# EAGLE board power (EAGLE 5.11)
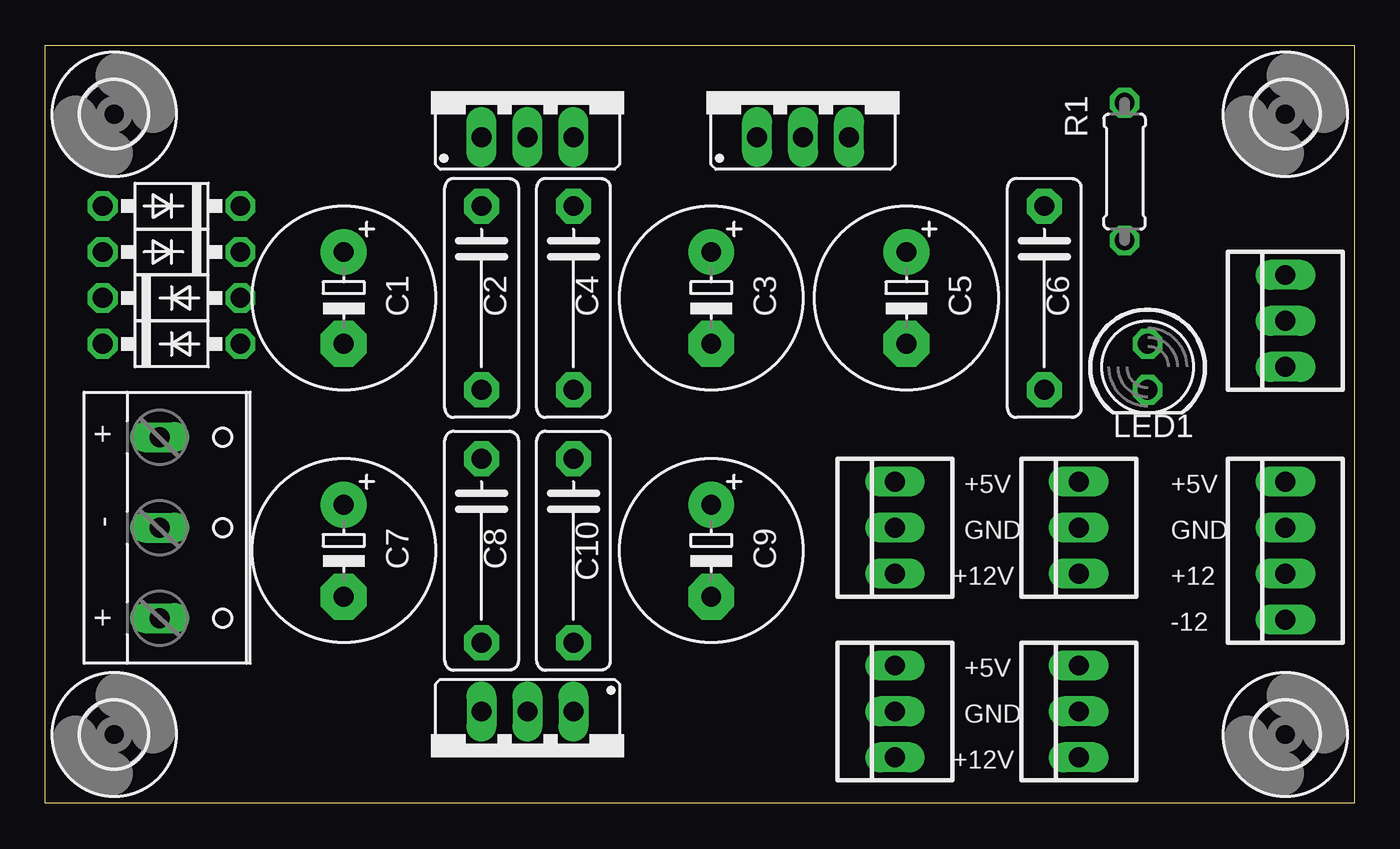
[diagram p0: board, top side]
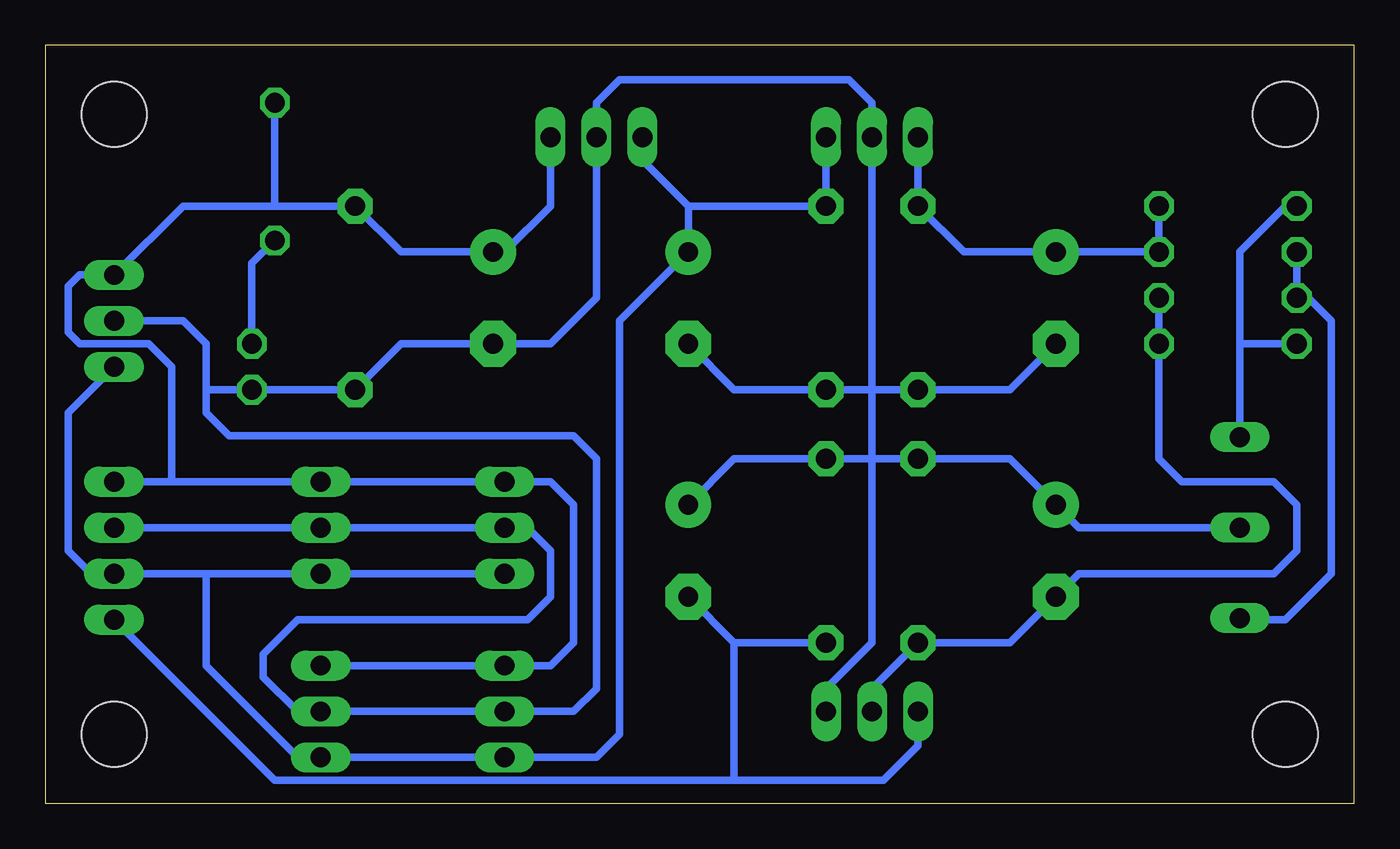
[diagram p1: board, bottom side, seen from below]

Size 72.39 x 41.91 mm. Coordinates in mm from the lower left corner, seen from the top.
Outline: 0,0 0,41.91 72.39,41.91 72.39,0 0,0
Copper layers (1*16): Top 0.035mm / dielectric 1.5mm / Bottom 0.035mm
Design rules "default": minimum track width 10mil, minimum drill 24mil, track to track 8mil, track to pad 8mil, pad to pad 8mil, via to via 8mil, smd to smd 8mil, copper to edge 40mil, drill to drill 8mil, minimum pad ring 10mil, minimum via ring 8mil, stop-mask expansion 4mil, vias tented up to drill 0mil, thermal gap 10mil

## Footprints (pad centres in the part's own frame; a part is rotated, then mirrored left to right if it is on the bottom)
E5-10,5 = drill 1.1 pad 2.54 round: + -2.54,0 | drill 1.1 pad 2.54 octagon: - 2.54,0
C102-043X133 = drill 1.1 pad 1.93 octagon: 1 -5.08,0; 2 5.08,0
DO41-10 = drill 1.1 octagon: A 3.81,0; C -3.81,0
78XXS = drill 1.1 long: GND 0,-2.54; IN -2.54,-2.54; OUT 2.54,-2.54
79XXS = drill 1.1 long: GND -2.54,-2.54; IN 0,-2.54; OUT 2.54,-2.54
LED5MM = drill 1.1 octagon: A -1.27,0; K 1.27,0
0207/7 = drill 1.1 octagon: 1 -3.81,0; 2 3.81,0
3,6 = hole 3.6: 0,0
W237-103 = drill 1.1 long: 1 -5,-1.29; 2 0,-1.29; 3 5,-1.29
22-23-2031 = drill 1.1 long: 1 -2.54,0; 2 0,0; 3 2.54,0
22-23-2041 = drill 1.1 long: 1 -3.81,0; 2 -1.27,0; 3 1.27,0; 4 3.81,0

## Placement (x,y rotation side)
C1  2200uF  [E5-10,5]  16.51,27.94 270 top
C2  100nF  [C102-043X133]  24.13,27.94 270 top
C3  220uF  [E5-10,5]  36.83,27.94 270 top
C4  100nF  [C102-043X133]  29.21,27.94 270 top
C5  220uF  [E5-10,5]  47.62,27.94 270 top
C6  100nF  [C102-043X133]  55.24,27.94 270 top
C7  2200uF  [E5-10,5]  16.51,13.97 270 top
C8  100nF  [C102-043X133]  24.13,13.97 270 top
C9  220uF  [E5-10,5]  36.83,13.97 270 top
C10  100nF  [C102-043X133]  29.21,13.97 270 top
D1  1N4004A  [DO41-10]  6.99,33.02 180 top
D2  1N4004A  [DO41-10]  6.99,30.48 180 top
D3  1N4004A  [DO41-10]  6.99,27.94 0 top
D4  1N4004A  [DO41-10]  6.99,25.4 0 top
IC1  LM7812  [78XXS]  26.67,39.37 0 top
IC2  LM7805  [78XXS]  41.91,39.37 0 top
IC3  LM7912  [79XXS]  26.67,2.54 180 top
LED1  [LED5MM]  60.96,24.13 270 top
R1  330  [0207/7]  59.69,34.92 90 top
U$1  [3,6]  3.81,3.81 0 top
U$2  [3,6]  3.81,38.1 0 top
U$3  [3,6]  68.58,38.1 0 top
U$4  [3,6]  68.58,3.81 0 top
X1  [W237-103]  7.62,15.24 270 top
X2  22-23-2031  [22-23-2031]  57.15,15.24 90 top
X3  22-23-2031  [22-23-2031]  46.99,15.24 90 top
X4  22-23-2031  [22-23-2031]  46.99,5.08 90 top
X5  22-23-2031  [22-23-2031]  68.58,26.67 90 top
X6  22-23-2031  [22-23-2031]  57.15,5.08 90 top
X7  22-23-2041  [22-23-2041]  68.58,13.97 90 top

## Library data of the parts
C1-C10 D1-D4 IC1-IC3 LED1 R1 U$1-U$4 X1-X7 = caixa

## Nets
+5V: C5.+ C6.1 IC2.OUT R1.2 X2.3 X3.3 X4.3 X5.3 X6.3 X7.4
+12V: C3.+ C4.1 IC1.OUT IC2.IN X2.1 X3.1 X4.1 X5.1 X6.1 X7.2
-12V: C9.- C10.2 IC3.OUT X7.1
GND: C1.- C2.2 C3.- C4.2 C5.- C6.2 C7.+ C8.1 C9.+ C10.1 IC1.GND IC2.GND IC3.GND LED1.K X1.2 X2.2 X3.2 X4.2 X5.2 X6.2 X7.3
N$5: C1.+ C2.1 D1.C D2.C IC1.IN
N$7: D1.A D4.C X1.1
N$8: C7.- C8.2 D3.A D4.A IC3.IN
N$9: D2.A D3.C X1.3
N$11: LED1.A R1.1

## Tracks (layer width: path | path; a pad name or v marks a point on that pad's centre or on a via)
+5V
  Bottom 0.406: IC2.OUT 44.45,33.02 46.99,30.48 C5.+ 52.7,30.48 C6.1 59.69,33.02 | X6.3 X4.3 44.45,7.62 43.18,8.89 43.18,16.51 44.45,17.78 X3.3 X2.3 65.41,17.78 | 65.41,17.78 X7.4 | 59.69,33.02 64.77,33.02 X5.3 70.48,29.21 71.12,28.57 71.12,26.04 70.48,25.4 66.67,25.4 65.41,24.13 65.41,17.78 | 59.69,33.02 R1.2
+12V
  Bottom 0.406: IC1.OUT C4.1 36.83,33.02 | 36.83,33.02 39.37,35.56 IC2.IN | 36.83,33.02 C3.+ 40.64,26.67 40.64,3.81 41.91,2.54 X4.1 X6.1 58.42,2.54 63.5,7.62 63.5,12.7 | X2.1 X3.1 X2.1 | X5.1 71.12,21.59 71.12,13.97 69.85,12.7 X7.2 63.5,12.7 | 63.5,12.7 X2.1
-12V
  Bottom 0.406: 34.29,8.89 C10.2 | 34.29,8.89 C9.- | IC3.OUT 24.13,3.17 26.04,1.27 34.29,1.27 | 34.29,1.27 34.29,8.89 | 34.29,1.27 59.69,1.27 X7.1
GND
  Bottom 0.406: X7.3 X2.2 X3.2 45.72,15.24 44.45,13.97 44.45,11.43 45.72,10.16 58.42,10.16 60.33,8.26 60.33,6.99 58.42,5.08 X6.2 X4.2 43.18,5.08 41.91,6.35 41.91,19.05 43.18,20.32 62.23,20.32 63.5,21.59 63.5,22.86 | X5.2 64.77,26.67 63.5,25.4 63.5,22.86 | 26.67,22.86 C2.2 19.05,22.86 C1.- | 26.67,22.86 C4.2 34.29,22.86 | 26.67,19.05 C8.1 19.05,19.05 C7.+ 15.24,15.24 X1.2 | 26.67,19.05 C10.1 34.29,19.05 C9.+ | IC3.GND 29.21,6.35 26.67,8.89 26.67,19.05 | 26.67,19.05 26.67,22.86 | 34.29,22.86 C3.- | 26.67,22.86 34.29,22.86 | 26.67,22.86 IC1.GND 26.67,38.73 27.94,40.01 40.64,40.01 41.91,38.73 IC2.GND 41.91,27.94 44.45,25.4 C5.- 52.7,25.4 C6.2 LED1.K 63.5,22.86
N$5
  Bottom 0.406: IC1.IN C2.1 21.59,30.48 C1.+ D2.C D1.C
N$7
  Bottom 0.406: D1.A 3.81,33.02 6.33,30.5 6.33,25.4 | X1.1 6.33,25.4 | 6.33,25.4 D4.C
N$8
  Bottom 0.406: IC3.IN 26.67,6.35 C8.2 19.05,8.89 C7.- 15.24,12.7 4.45,12.7 3.17,13.97 3.17,16.51 4.45,17.78 9.53,17.78 10.79,19.05 D4.A D3.A
N$9
  Bottom 0.406: D2.A D3.C 2.54,27.94 1.27,26.67 1.27,12.7 3.81,10.16 6.25,10.16 X1.3
N$11
  Bottom 0.406: LED1.A 60.96,29.84 R1.1

## Text on the board
tNames: + | +5V | +5V | - | GND | GND | +12V | +12 | + | -12 | +5V | GND | +12V